# Altium PCB Powerbank.PcbDoc
Units mm, origin at the board's own origin, x right, y up, seen from the top; angles counter-clockwise.
Board outline 54.74 x 57.91 mm, 2 copper layers (Top Layer, Bottom Layer); 33 components, 12 nets, 89 pads, 0 vias.
Unrouted connection lines stored in the file: 45.
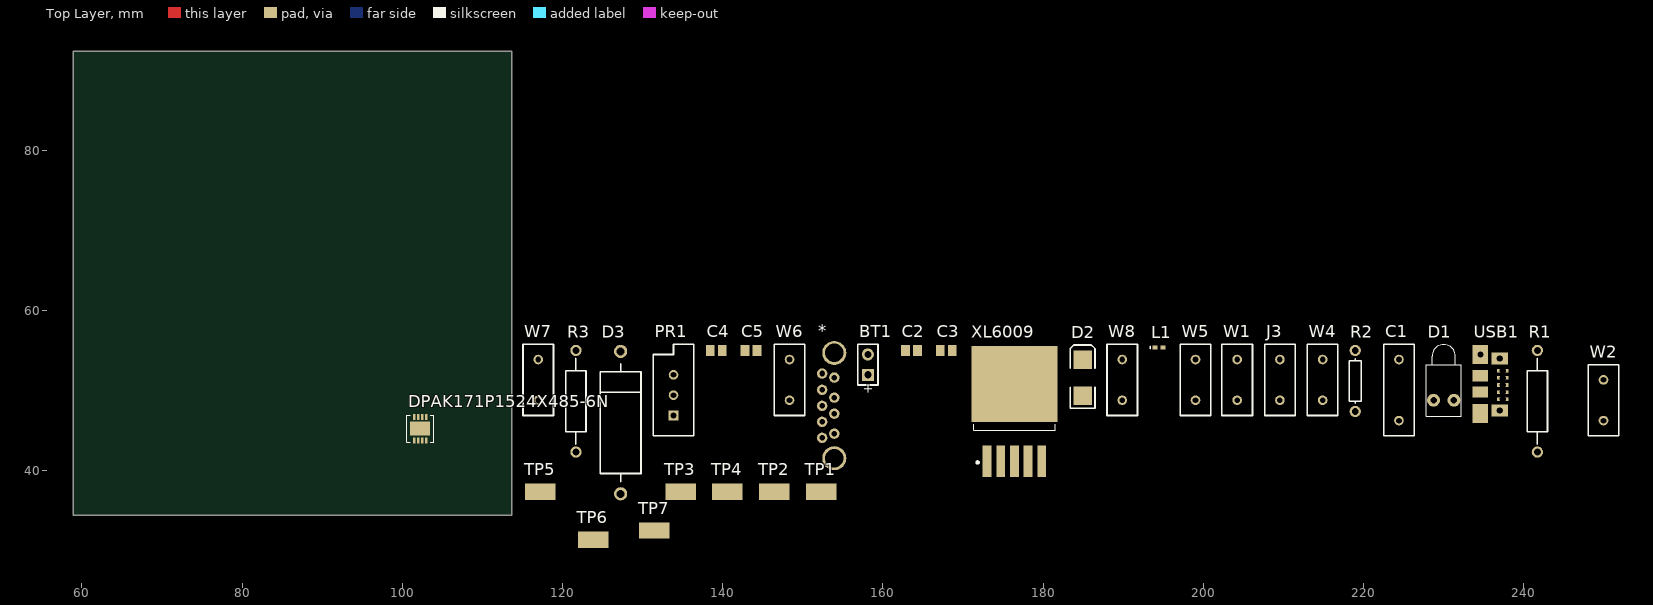
[diagram p0: Top Layer view]
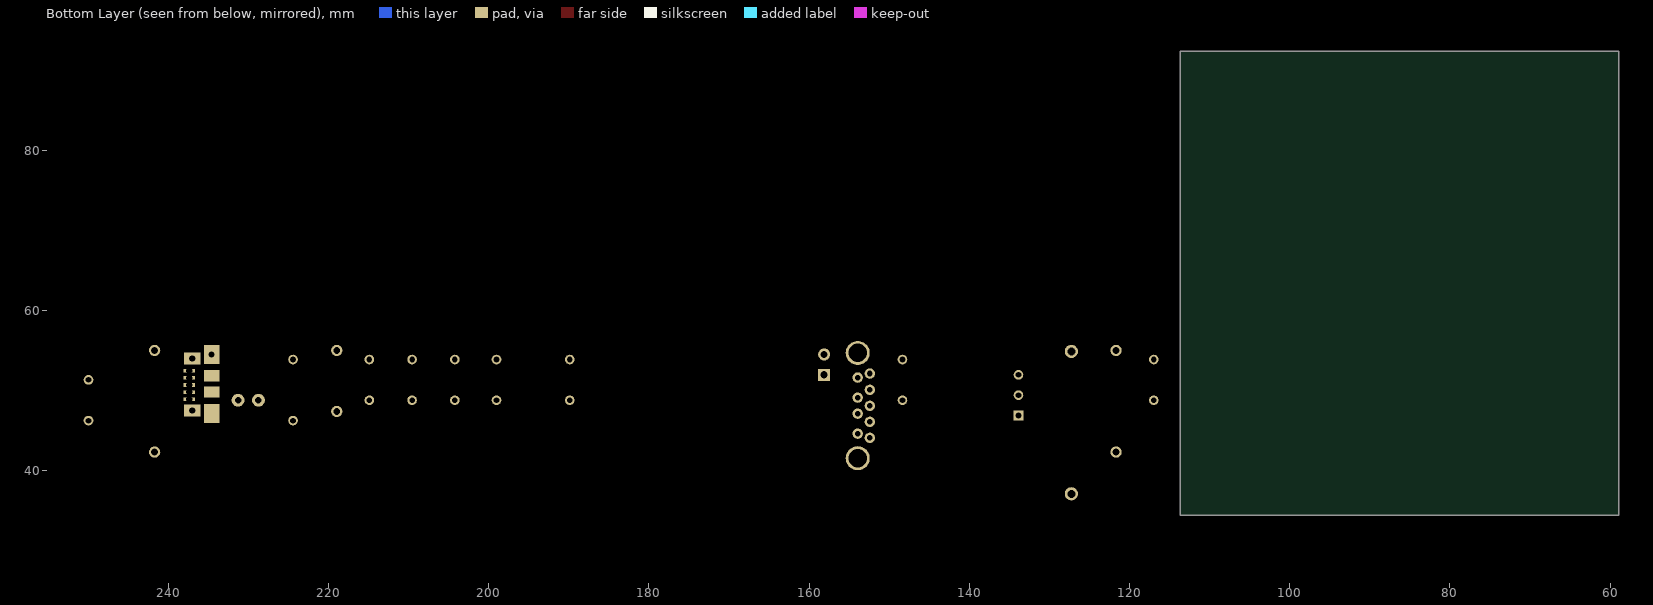
[diagram p1: Bottom Layer view, seen from below]

## Layer stack, top to bottom
Top Solder: solder mask 0.0102, Solder Resist, Dk 3.5
Top Layer: signal copper 0.0356
Dielectric 1: dielectric 0.32, FR-4, Dk 4.8
Bottom Layer: signal copper 0.0356
Bottom Solder: solder mask 0.0102, Solder Resist, Dk 3.5

## Board outline
58.928,34.417 113.665,34.417 113.665,92.329 58.928,92.329

## Design rules (kind name [scope] priority, off if disabled: settings)
Clearance [All] p1: gap=0.254 ignorepadtopadclearanceinfootprint=FALSE except(0: Arc-Hole Track-Hole SMDPad-Hole THPad-Hole Via-Hole Fill-Hole Poly-Hole Region-Hole Text-Hole; 0.15: SMDPad-SMDPad)
PolygonConnect [All] p1: connectstyle=Relief reliefconductorwidth=0.254 reliefentries=4 polygonreliefangle="90 Angle" airgapwidth=0.254
RoutingVias [All] p1: holewidth=0.711 width=1.27 viastyle="Through Hole" minholewidth=0.711 minwidth=1.27 maxholewidth=0.711 maxwidth=1.27
SolderMaskExpansion [All] p1: expansion=0.102
Width [All] p1: maxlimit=0.254 minlimit=0.254 preferedwidth=0.254
30 further rules are at their usual default settings.

## Components (designator, comment, footprint, x,y, rotation, side; value= is the part's Value field where it differs from the comment)
* "USB-A-3" USB3 153.924,41.529 r90 top
BT1 "Battery" BAT-2 158.115,53.213 r90 top
C1 "Cap" RAD-0.3 224.409,50.038 r90 top value=4.7uF
C2 "C2" C0805 163.576,54.991 r0 top value=47uF
C3 "1uF" C0805 167.894,54.991 r0 top
C4 "1uF" C0805 139.192,54.991 r0 top
C5 "220uF" C0805 143.51,54.991 r0 top
D1 "LED1" LED-1 229.997,48.768 r90 top
D2 "D Schottky" SMB 184.912,51.562 r90 top
D3 "D Zener" DIODE-0.7 127.254,45.974 r90 top
DPAK171P1524X485-6N "LTC-405842" DFN-8_DD 102.235,45.212 r90 top
J3 "GND" RAD-0.2 209.55,51.308 r90 top
L1 "Inductor" 0402-A 194.437,55.372 r0 top value=33uH
PR1 "5K" VR5 133.858,49.403 r90 top
R1 "Res Semi" AXIAL-0.5 241.681,48.641 r90 top value=1K
R2 "Res1" AXIAL-0.3 218.948,51.181 r90 top value=2K
R3 "Res Semi" AXIAL-0.5 121.666,48.641 r90 top value=1K
TP1 "5019" TP380X203 152.273,37.338 r0 top
TP2 "5019" TP380X203 146.431,37.338 r0 top
TP3 "5019" TP380X203 134.747,37.338 r0 top
TP4 "5019" TP380X203 140.589,37.338 r0 top
TP5 "5019" TP380X203 117.221,37.338 r0 top
TP6 "5019" TP380X203 123.825,31.369 r0 top
TP7 "5019" TP380X203 131.445,32.512 r0 top
USB1 "USB-Micro-1" USB_Micro1 234.569,46.99 r0 top
W1 "GND" RAD-0.2 204.216,51.308 r90 top
W2 "+PWR" RAD-0.2 249.936,48.768 r90 top
W4 "+VOUT" RAD-0.2 214.884,51.308 r90 top
W5 "+VIN" RAD-0.2 199.009,51.308 r90 top
W6 "J6 GND" RAD-0.2 148.336,51.308 r90 top
W7 "Jumper gnd" RAD-0.2 116.967,51.308 r90 top
W8 "Jumper +vout" RAD-0.2 189.865,51.308 r90 top
XL6009 "XL6009 Boost" DPAK171P1524X485-6N 176.403,47.498 r0 top

## Footprints (in the part's own frame and the unit in brackets; to place one, negate y for a bottom-side part, rotate by r counter-clockwise, add the part's x,y. Pads: shape width x height; smd on the part's side, far side on the other; paste and mask are expansions set on the pad)
0402-A [mm] "Chip Inductor, Body 1.0x0.5mm, IPC High Density"
  rect 0.6x0.5 smd: 1(-0.5,0) 2(0.5,0)
  silkscreen extent -1.1,-0.15 -1.1,0.15, body extent -0.55,-0.3 0.55,0.3, height 0.55
AXIAL-0.3 [mm] "Axial Device, Thru-Hole; 2 Leads; 0.3 in Pin Spacing"
  round 1.4 hole 0.85: 1(-3.81,0) 2(3.81,0)
  silkscreen extent -2.77,-0.76 2.77,0.76
AXIAL-0.5 [mm] "Axial Device, Thru-Hole; 2 Leads; 0.5 in Pin Spacing"
  round 1.4 hole 0.85: 1(-6.35,0) 2(6.35,0)
  silkscreen extent -5.33,-1.27 5.33,1.27
BAT-2 [mm] "Battery; 2 Leads"
  rect 1.5x1.5 hole 0.9: 1(-1.27,0)
  round 1.5 hole 0.9: 2(1.27,0)
  silkscreen extent -2.54,-1.27 2.54,1.27
C0805 [mm] "Chip Capacitor, Body 2.0x1.3mm, IPC High Density"
  rect 1.1x1.4 smd: 1(-0.75,0) 2(0.75,0)
  body extent -1.1,-0.72 1.1,0.72, height 1.4
DFN-8_DD [mil]
  rect 31x12 smd: 1(-57.5,29.53) 2(-57.5,9.84) 3(-57.5,-9.84) 4(-57.5,-29.53) 5(57.5,-29.53) 6(57.5,-9.84) 7(57.5,9.84) 8(57.5,29.53)
  rect 69x98 smd: 9(0,0)
  silkscreen extent -66,-66 66,66
DIODE-0.7 [mm] "Diode, Thru-Hole; 2 Leads; 0.7 in Pin Spacing"
  round 1.65 hole 1: 1(-8.89,0) 2(8.89,0)
  silkscreen extent -7.37,-2.54 7.37,2.54
DPAK171P1524X485-6N [mm]
  rect 1.1x3.93 smd: 1(-3.42,-6.33) 2(-1.71,-6.33) 3(0,-6.33) 4(1.71,-6.33) 5(3.42,-6.33)
  rect 10.75x9.45 smd: 6(0,3.3)
  silkscreen extent -5.1,-6.64 5.1,-1.7
LED-1 [mm] "LED; 2 Leads"
  round 1.6 hole 0.8: 1(0,1.27) 2(0,-1.27)
  silkscreen extent -2,-2.2 6.95,2.2
RAD-0.2 [mm] "Radial Cap, Thru-Hole; 2 Leads; 0.2 in Pin Spacing"
  round 1.2 hole 0.7: 1(-2.54,0) 2(2.54,0)
  silkscreen extent -4.44,-1.91 4.44,1.91
RAD-0.3 [mm] "Radial Cap, Thru-Hole; 2 Leads; 0.3 in Pin Spacing"
  round 1.2 hole 0.7: 1(-3.81,0) 2(3.81,0)
  silkscreen extent -5.71,-1.91 5.71,1.91
SMB [mm] "DO-214-AA/SMB; 2 C-Bend Leads; Body 5.3 x 3.6 mm, inc. leads (LxW)"
  rect 2.3x2.3 smd: 1(-2.25,0) 2(2.25,0)
  silkscreen extent -3.8,-1.55 4.1,1.55
TP380X203 [mm]
  rect 3.8x2.03 smd: 1(0,0)
USB3 [mm]
  round 3 hole 2.3: 10(0,0) 15(13.14,0)
  round 1.3 hole 0.7: 11(3.07,0) 12(5.57,0) 13(7.57,0) 14(10.07,0) 16(2.54,1.524) 17(4.54,1.524) 18(6.54,1.524) 19(8.54,1.524) 20(10.57,1.524)
USB_Micro1 [mil]
  rect 76.77x94.29 all layers, no hole: 1(0,5)
  rect 76.77x55.12 all layers, no hole: 2(0,110) 3(0,190)
  rect 76.77x94.29 hole 30: 4(0,295)
  rect 82.68x57.87 hole 30: 5(95,20) 11(95,275)
  rect 54.33x17.72 hole 30: 6(110,75) 7(110,110) 8(110,145) 9(110,180) 10(110,215)
VR5 [mm] "Thru-Hole; 3 Leads"
  rect 1.2x1.2 hole 0.7: 1(-2.54,0)
  round 1.2 hole 0.7: 2(0,0) 3(2.54,0)
  silkscreen extent -5.08,-2.54 6.35,2.54

## Part data
BT1: "Multicell Battery", LatestRevisionDate=17-Jul-2002, LatestRevisionNote="Re-released for DXP Platform.", PackageDescription="Battery; 2 Leads", PackageReference=BAT-2, Published=24-Mar-1999, Publisher="Altium Limited"
C1: "Capacitor", LatestRevisionDate=17-Jul-2002, LatestRevisionNote="Re-released for DXP Platform.", PackageDescription="Radial Cap, Thru-Hole; 2 Leads; 0.3 in Pin Spacing", PackageReference=RAD-0.3, Published=8-Jun-2000, Publisher="Altium Limited"
C2 C3 C4 C5: library part "Cap Pol3", "Polarized Capacitor (Surface Mount)", LatestRevisionDate=29-May-2009, LatestRevisionNote="IPC-7351 Footprint Added.", PackageDescription="Chip Capacitor", PackageReference=C0805, Published=8-Jun-2000, Publisher="Altium Limited"
D1: "Typical RED GaAs LED", LatestRevisionDate=08-Jul-2005, LatestRevisionNote="Mech Layer 1 removed.", PackageDescription="LED; 2 Leads", PackageReference=LED-1, Published=8-Jun-2000, Publisher="Altium Limited"
D2: "Schottky Diode", Code_JEDEC=DO-214-AA, LatestRevisionDate=17-Jul-2002, LatestRevisionNote="Re-released for DXP Platform.", PackageDescription="DO-214-AA/SMB; 2 C-Bend Leads; Body 5.3 x 3.6 mm, inc. leads (LxW)", PackageReference=SMB, Published=8-Jun-2000, Publisher="Altium Limited"
D3: "Zener Diode", LatestRevisionDate=17-Jul-2002, LatestRevisionNote="Re-released for DXP Platform.", PackageDescription="Diode, Thru-Hole; 2 Leads; 0.7 in Pin Spacing", PackageReference=DIODE-0.7, Published=8-Jun-2000, Publisher="Altium Limited"
J3 W1 W2 W4 W5 W6 W7 W8: library part Jumper, "Jumper Wire", LatestRevisionDate=17-Jul-2002, LatestRevisionNote="Re-released for DXP Platform.", PackageDescription="Radial Cap, Thru-Hole; 2 Leads; 0.2 in Pin Spacing", PackageReference=RAD-0.2, Published=24-Mar-1999, Publisher="Altium Limited"
PR1: library part RPot, "Potentiometer", LatestRevisionDate=17-Jul-2002, LatestRevisionNote="Re-released for DXP Platform.", PackageDescription="Variable Resistor, Thru-Hole; 3 Leads", PackageReference=VR5, Published=8-Jun-2000, Publisher="Altium Limited", Set Position=0.5, Sim Note="Enter the Resistance value and the set point into parameter fields."
R1 R3: "Semiconductor Resistor", LatestRevisionDate=17-Jul-2002, LatestRevisionNote="Re-released for DXP Platform.", PackageDescription="Axial Device, Thru-Hole; 2 Leads; 0.5 in Pin Spacing", PackageReference=AXIAL-0.5, Published=8-Jun-2000, Publisher="Altium Limited"
R2: "Resistor", LatestRevisionDate=17-Jul-2002, LatestRevisionNote="Re-released for DXP Platform.", PackageDescription="Axial Device, Thru-Hole; 2 Leads; 0.3 in Pin Spacing", PackageReference=AXIAL-0.3, Published=8-Jun-2000, Publisher="Altium Limited"
TP1 TP2 TP3 TP4 TP5 TP6 TP7: "PC TEST POINT MINI SMD", Package=None, Availability=Good, MF=Keystone, MP=5019, Price="0.18 USD"
L1: Code_IEC=1005, Code_JEITA=0402, LatestRevisionDate=29-May-2009, LatestRevisionNote="IPC-7351 Footprint Added.", PackageDescription="Chip Inductor", PackageReference=0402-A, Published=8-Jun-2000, Publisher="Altium Limited"

## Nets (pads, with @x,y where several pads share a name; then routed paths per layer and width w, separated by ;. In a path a pad name is that pad's centre, name@x,y a point inside that pad or via, vN(x,y) a via of type N, cw(c..) or ccw(c..) an arc to the next point about the centre after c; other vN are vias at no path point)
GND: BT1.2 C1.1 DPAK171P1524X485-6N.4 DPAK171P1524X485-6N.8 J3.1 R2.1 USB1.5 W1.2 XL6009.1
Net*_1: C4.1 C5.1 D2.2 D3.2 PR1.1 TP6.1 TP7.1 W8.1
Net*_4: C4.2 C5.2 D3.1 R3.1 W7.1
NetBT1_1: BT1.1 C2.1 C3.1 DPAK171P1524X485-6N.1 DPAK171P1524X485-6N.2 L1.1 TP2.1 TP4.1 W4.1 W5.2 XL6009.2 XL6009.4
NetC1_2: C1.2 DPAK171P1524X485-6N.6 R1.1 TP1.1 USB1.1 W2.2
NetC2_2: C2.2 C3.2 W6.2
NetD1_1: D1.1 R1.2
NetD1_2: D1.2 DPAK171P1524X485-6N.3
NetD2_1: D2.1 L1.2 XL6009.3
NetDPAK171P1524X485-6N_5: DPAK171P1524X485-6N.5 R2.2
NetPR1_2: PR1.2 R3.2
NetPR1_3: PR1.3 TP5.1 XL6009.5
pads on no net: *.10 *.11 *.12 *.13 *.14 *.15 *.16 *.17 *.18 *.19 *.20 DPAK171P1524X485-6N.7 DPAK171P1524X485-6N.9 J3.2 TP3.1 USB1.2 USB1.3 USB1.4 USB1.6 USB1.7 USB1.8 USB1.9 USB1.10 USB1.11 W1.1 W2.1 W4.2 W5.1 W6.1 W7.2 W8.2 XL6009.6

## Silkscreen, mask and mechanical layers (free items; w line width, h text height)
OUTLINE:
  lines w0.254: 113.284,34.29 113.665,34.671
  lines w1: 113.284,34.29 58.928,34.29 58.928,92.456 113.665,92.456 113.665,34.671

## Text inside footprints (layer, text, board x,y; h text height)
BT1: Top Overlay "+" at 158.692,49.543 h1.15 r90